# Altium PCB slip-contacts.PcbDoc
Units mm, origin at the board's own origin, x right, y up, seen from the top; angles counter-clockwise.
Board outline 14.3 x 13.1 mm, 2 copper layers (Top Layer, Bottom Layer); 7 components, 3 nets, 31 pads, 12 vias.
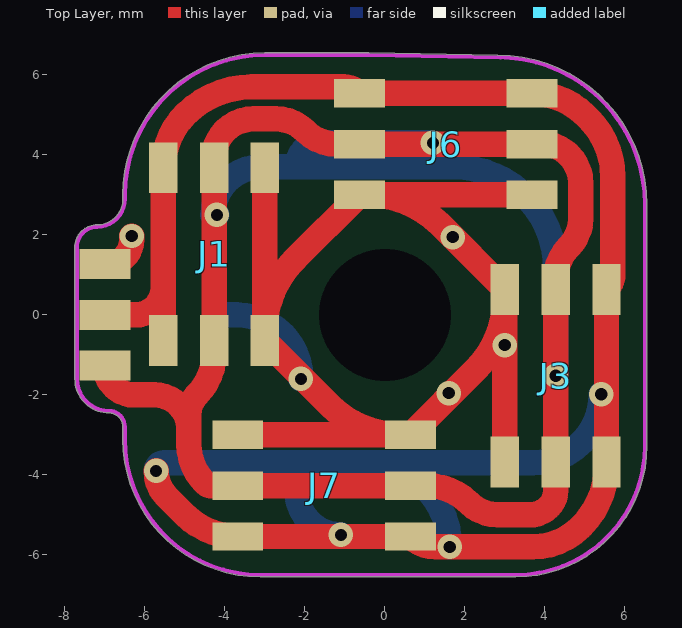
[diagram p0: Top Layer view]
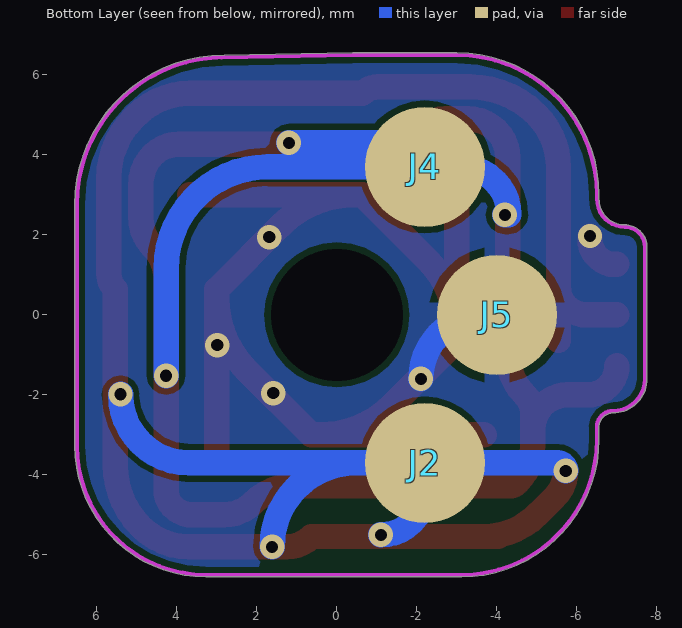
[diagram p1: Bottom Layer view, seen from below]
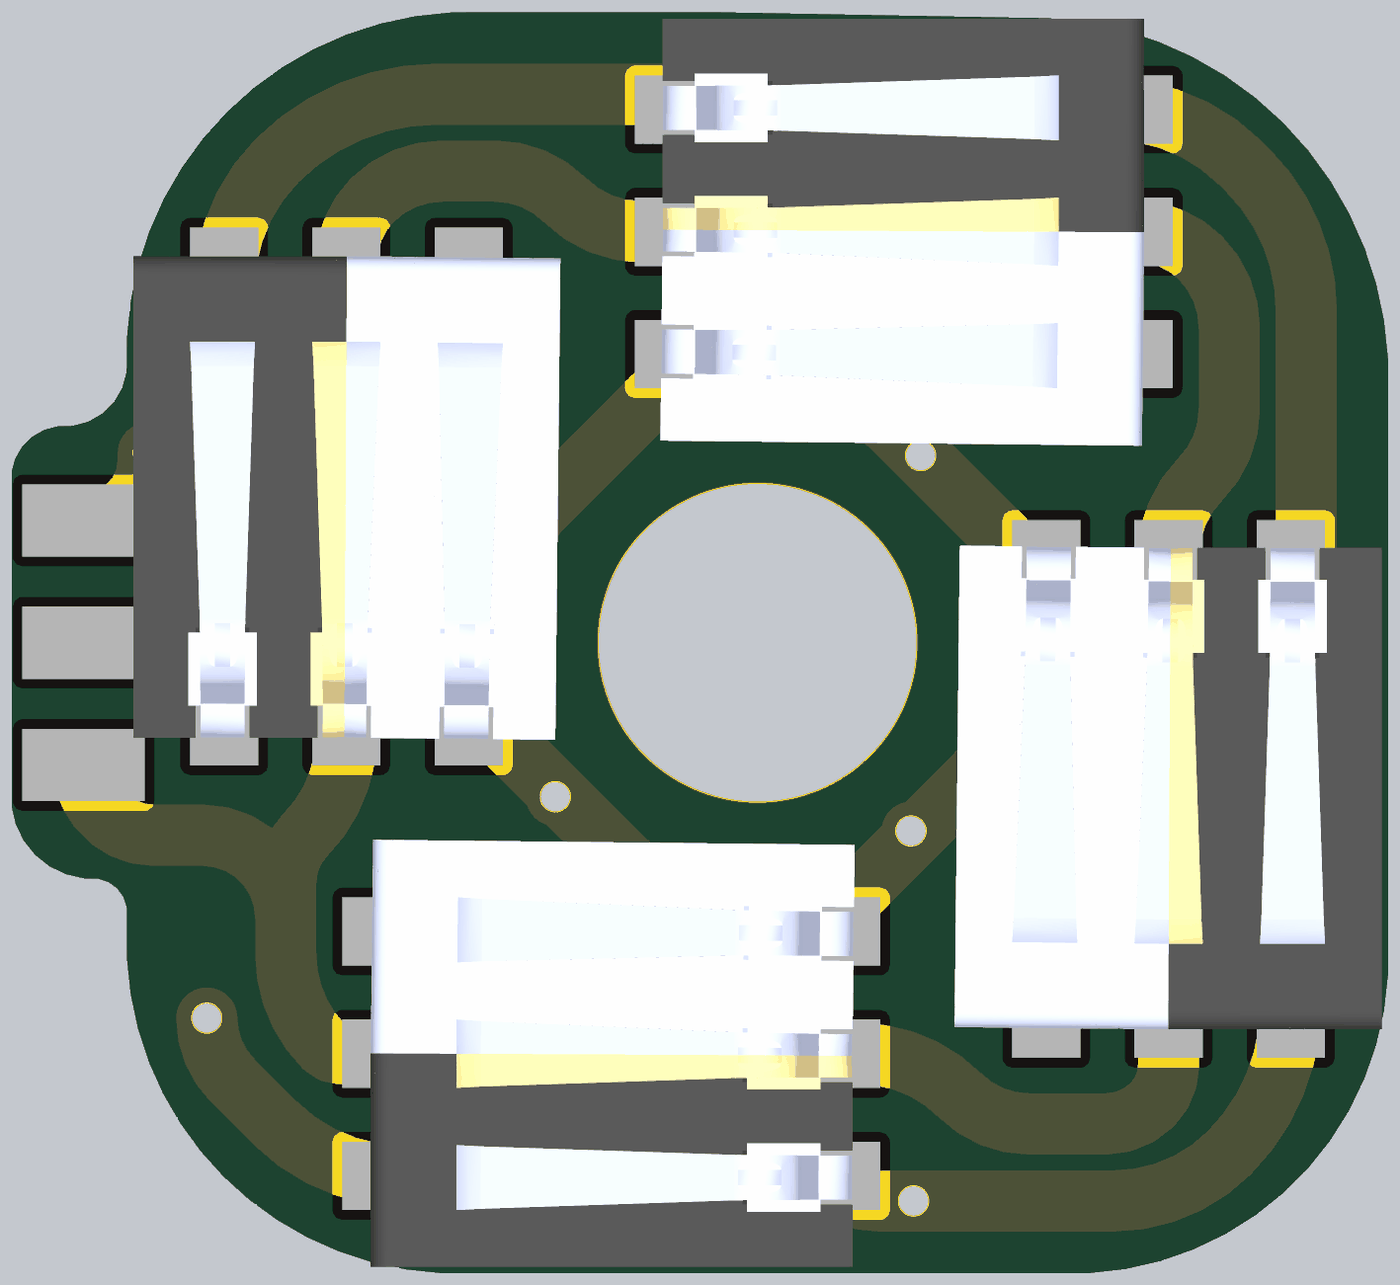
[diagram p2: 3D render of the assembled board from above, using the file's embedded part models]

## Layer stack, top to bottom
Top Solder: solder mask 0.0102, Solder Resist, Dk 3.5
Top Layer: signal copper 0.0356
Dielectric 1: dielectric 0.32, FR-4, Dk 4.8
Bottom Layer: signal copper 0.0356
Bottom Solder: solder mask 0.0102, Solder Resist, Dk 3.5

## Board outline
-6.9,-2.45 cw(c-6.9,-2.8) -6.55,-2.8 -6.55,-3.114 ccw(c-3.114,-3.114) -3.114,-6.55 3.273,-6.55 ccw(c3.273,-3.273) 6.55,-3.273 6.55,2.763 ccw(c2.821,2.763) 2.821,6.492 ccw(c2.821,6.442) 2.821,6.492 -0.399,6.55 ccw(c-0.4,6.5) -0.4,6.55 -3,6.55 ccw(c-3,3) -6.55,3 -6.55,2.9 cw(c-7.2,2.9) -7.2,2.25 ccw(c-7.2,1.7) -7.75,1.7 -7.75,-1.6 ccw(c-6.9,-1.6)

## Design rules (kind name [scope] priority, off if disabled: settings)
Clearance [All] p1: gap=0.152 ignorepadtopadclearanceinfootprint=FALSE except(0: Arc-Hole Track-Hole SMDPad-Hole THPad-Hole Via-Hole Fill-Hole Poly-Hole Region-Hole Text-Hole)
HoleSize [All] p1: absolutevalues=TRUE maxlimit=1000 minlimit=0.025 maxpercent=80.000 minpercent=20.000
MinimumSolderMaskSliver [All] p1 off: minsoldermaskwidth=0.254
PolygonConnect [All] p1: thpad.connectstyle=Direct thpad.reliefconductorwidth=0.254 thpad.reliefentries=4 thpad.polygonreliefangle="90 Angle" thpad.airgapwidth=0.254 smdpad.connectstyle=Relief smdpad.reliefconductorwidth=0.635 smdpad.reliefentries=4 smdpad.polygonreliefangle="90 Angle" smdpad.airgapwidth=0.203 via.connectstyle=Direct via.reliefconductorwidth=0.254 via.reliefentries=4 via.polygonreliefangle="90 Angle" via.airgapwidth=0.254
RoutingVias [All] p1: holewidth=0.711 width=1.27 viastyle="Through Hole" minholewidth=0.2 minwidth=0.45 maxholewidth=0.711 maxwidth=1.27
SilkToSilkClearance [All] p1 off: silktosilkclearance=0.254
SilkToSolderMaskClearance [IsPad] p1 off: minsilkscreentomaskgap=0.254 clearancetoexposedcopper=TRUE
SolderMaskExpansion [All] p1: expansion=0.102 istentingtop=FALSE
Width [All] p1: maxlimit=5.08 minlimit=0.152 preferedwidth=0.254 minimp=50.000000 maximp=50.000000 favimp=50.000000
26 further rules are at their usual default settings.

## Components (designator, comment, footprint, x,y, rotation, side; value= is the part's Value field where it differs from the comment)
J1 "Spring Contacts 3p" 70ABJ-3-M0E -4.27,0 r0 top locked
J2 "pad single" PAD_SING -2.2,-3.7 r0 top
J3 "Spring Contacts 3p" 70ABJ-3-M0E 4.27,0 r180 top locked
J4 "pad single" PAD_SING -2.2,3.7 r0 top
J5 "pad single" PAD_SING -4,0 r0 top
J6 "Spring Contacts 3p" 70ABJ-3-M0E 0,4.27 r270 top locked
J7 "Spring Contacts 3p" 70ABJ-3-M0E 0,-4.27 r90 top locked

## Footprints (in the part's own frame and the unit in brackets; to place one, negate y for a bottom-side part, rotate by r counter-clockwise, add the part's x,y. Pads: shape width x height; smd on the part's side, far side on the other; paste and mask are expansions set on the pad)
70ABJ-3-M0E [mm]
  rect 0.71x1.27 smd: 1(-1.27,-0.639) 2(0,-0.639) 3(1.27,-0.639) 4(1.27,3.679) 5(0,3.679) 6(-1.27,3.679)
  body extent -2.21,-1.01 2.22,4.02, height 3.33
PAD_SING [mm]
  round 3 smd far side: 1(0,0)

## Part data
J1 J3 J6 J7: library part ‎70ABJ-3-M0E‎, "Spring loaded electrical contacts"
J2 J4 J5: library part PAD-SING

## Free pads (board coordinates)
  rect 1.27x0.75 smd: 1(-7,0) 1(-7,1.27) 5(-7,-1.27)
  round 0 hole 3.3: 4(0,0)

## Via types
v1: diameter 0.61, hole 0.305, Top Layer to Bottom Layer, tented both sides, 12 vias

## Nets (pads, with @x,y where several pads share a name; then routed paths per layer and width w, separated by ;. In a path a pad name is that pad's centre, name@x,y a point inside that pad or via, vN(x,y) a via of type N, cw(c..) or ccw(c..) an arc to the next point about the centre after c; other vN are vias at no path point)
3V3: J1.1 J1.6 J2.1 J3.1 J3.6 J6.1 J6.6 J7.1 J7.6 pad.1@-7,0 | length 58.6
  Top Layer w0.635: pad.1@-7,0 -6.24,0 ccw(c-6.24,0.7) -5.54,0.7 ; v1(-5.72,-3.9) ccw(c-4.803,-3.9) -5.452,-4.548 -5.012,-4.988 ccw(c-3.679,-3.654) J7.6 ; J1.1 J1.6 cw(c-3.654,3.679) -4.988,5.012 cw(c-3.327,3.352) -3.327,5.7 -1.025,5.7 cw(c-1.025,5.154) J6.1 J6.6 cw(c3.679,3.654) 5.012,4.988 5.1,4.9 cw(c3.651,3.451) 5.7,3.451 5.7,1.025 cw(c5.154,1.025) J3.1 J3.6 5.54,-3.755 cw(c3.355,-3.755) 4.9,-5.3 cw(c3.693,-4.093) 3.693,-5.8 1.267,-5.8 cw(c1.267,-4.912) J7.1 J7.6 ; J7.6@-4.038,-5.54 J7.6
  Bottom Layer w0.635: v1(-5.72,-3.9) cw(c-5.52,-3.9) -5.52,-3.7 J2.1 ; v1(-1.1,-5.5) cw(c-1.1,-4.4) -2.2,-4.4 J2.1 ; v1(1.62,-5.8) ccw(c-0.48,-5.8) -0.48,-3.7 ; v1(5.409,-1.984) cw(c3.693,-1.984) 3.693,-3.7 -0.48,-3.7 ; J2.1 -0.48,-3.7
GND: J1.3 J1.4 J3.3 J3.4 J5.1 J6.3 J6.4 J7.3 J7.4 pad.1@-7,1.27 | length 38.3
  Top Layer w0.635: pad.1@-7,1.27 -6.83,1.27 ccw(c-6.962,1.891) -6.327,1.893 v1(-6.327,1.973) ; J7.4 J7.3@0.413,-3 ; J1.4 J1.3@-3,-0.413 ; J3.4 J3.3@3,0.413 ; J6.4 J6.3@-0.413,3 ; J1.3@-3,-0.413 cw(c-0.46,-0.413) -2.256,1.383 J6.3 J6.3@-0.413,3 ; J1.3@-3,-0.413 J1.3 -1.383,-2.256 ccw(c0.413,-0.46) J7.3@0.413,-3 ; J6.3@-0.413,3 cw(c-0.413,0.46) 1.383,2.256 J3.3 J3.3@3,0.413 ; J7.3@0.413,-3 J7.3 2.256,-1.383 ccw(c0.46,0.413) J3.3@3,0.413
  Bottom Layer w0.635: J5.1 -3.7,0 cw(c-3.7,-1.6) v1(-2.1,-1.6)
  other v1: 1.594,-1.956 2.994,-0.756 1.694,1.944
TX: J1.2 J1.5 J3.2 J3.5 J4.1 J6.2 J6.5 J7.2 J7.5 pad.5 | length 56.3
  Top Layer w0.635: pad.5 ccw(c-6.27,-1.27) -6.27,-2 -5.759,-2 cw(c-5.759,-2.859) -4.9,-2.859 ; -4.9,-2.859 -4.9,-2.483 cw(c-4.217,-2.483) -4.7,-2 ccw(c-5.738,-0.962) -4.27,-0.962 J1.2 J1.5 -4.27,3.948 cw(c-3.348,3.948) -4,4.6 cw(c-3.276,3.876) -3.276,4.9 -2.724,4.9 cw(c-2.724,3.876) -2,4.6 ccw(c-1.203,5.397) -1.203,4.27 J6.2 J6.5 3.948,4.27 cw(c3.948,3.348) 4.6,4 cw(c3.876,3.276) 4.9,3.276 4.9,2.424 cw(c3.876,2.424) 4.6,1.7 ccw(c5.397,0.903) 4.27,0.903 J3.2 v1(4.27,-1.52) J3.5 4.27,-4.39 cw(c3.69,-4.39) 4.1,-4.8 cw(c3.617,-4.317) 3.617,-5 2.824,-5 cw(c2.824,-3.976) 2.1,-4.7 ccw(c1.062,-5.738) 1.062,-4.27 J7.2 J7.5 -4.331,-4.27 cw(c-4.331,-4.031) -4.5,-4.2 cw(c-3.534,-3.234) -4.9,-3.234 -4.9,-2.859
  Bottom Layer w0.635: v1(-4.2,2.5) -4.3,2.5 cw(c-3.1,2.5) -3.1,3.7 J4.1 ; v1(1.2,4.3) -1.6,4.3 ccw(c-1.6,3.7) J4.1 ; v1(4.27,-1.52) 4.27,1.16 ccw(c1.73,1.16) 1.73,3.7 J4.1

## Polygon pours and split planes (outlines as drawn)
GND on Bottom Layer "NONET_L-01_P-001" (solid, remove dead copper, pour order 0): -5.06,7.9 ccw(c-5.06,5.36) -7.6,5.36 -7.6,-5.06 ccw(c-5.06,-5.06) -5.06,-7.6 5.76,-7.6 ccw(c5.76,-5.06) 8.3,-5.06 8.3,5.36 ccw(c5.76,5.36) 5.76,7.9

## Keep-outs
Keep-Out Layer:
  lines w0.1: 2.821,6.442 cw(c2.821,2.763) 6.5,2.763 6.5,-3.273 cw(c3.273,-3.273) 3.273,-6.5 -3.114,-6.5 cw(c-3.114,-3.114) -6.5,-3.114 -6.5,-2.8 ccw(c-6.9,-2.8) -6.9,-2.4 cw(c-6.9,-1.6) -7.7,-1.6 -7.7,1.7 cw(c-7.2,1.7) -7.2,2.2 ccw(c-7.2,2.9) -6.5,2.9 -6.5,3 cw(c-3,3) -3,6.5 -0.4,6.5 2.888,6.441